# EAGLE board eagle (EAGLE 9.3.1)

Size 100 x 80 mm. Coordinates in mm from the lower left corner, seen from the top.
Outline: 0,0 100,0 100,80 0,80 0,0
Copper layers (1*16): Top 0.035mm / dielectric 1.5mm / Bottom 0.035mm
Design rules "default": minimum track width 6mil, minimum drill 0.35mm, track to track 6mil, track to pad 6mil, pad to pad 6mil, via to via 6mil, smd to smd 6mil, copper to edge 40mil, drill to drill 6mil, minimum pad ring 10mil, minimum via ring 8mil, stop-mask expansion 4mil, vias tented up to drill 0mil, thermal gap 10mil

## Footprints (pad centres in the part's own frame; a part is rotated, then mirrored left to right if it is on the bottom)
DIL16 = drill 0.813 long: 1 -8.89,-3.81; 2 -6.35,-3.81; 3 -3.81,-3.81; 4 -1.27,-3.81; 5 1.27,-3.81; 6 3.81,-3.81; 7 6.35,-3.81; 8 8.89,-3.81; 9 8.89,3.81; 10 6.35,3.81; 11 3.81,3.81; 12 1.27,3.81; 13 -1.27,3.81; 14 -3.81,3.81; 15 -6.35,3.81; 16 -8.89,3.81
DIL08 = drill 0.813 long: 1 -3.81,-3.81; 2 -1.27,-3.81; 3 1.27,-3.81; 4 3.81,-3.81; 5 3.81,3.81; 6 1.27,3.81; 7 -1.27,3.81; 8 -3.81,3.81
C025-050X050 = drill 0.813 octagon: 1 -1.27,0; 2 1.27,0
7SEG-13 = drill 0.813 long: 1 -5.08,-7.62; 2 -2.54,-7.62; 3 0,-7.62; 4 2.54,-7.62; 5 5.08,-7.62; 6 5.08,7.62; 7 2.54,7.62; 8 0,7.62; 9 -2.54,7.62; 10 -5.08,7.62
LED_LD260 = drill 0.813 octagon: A -1.27,0; K 1.27,0
1X03 = drill 1.016 long: 1 -2.54,0; 2 0,0; 3 2.54,0
F09V = drill 1.016 octagon: 1 5.486,1.422; 2 2.743,1.422; 3 0,1.422; 4 -2.743,1.422; 5 -5.486,1.422; 6 4.115,-1.422; 7 1.372,-1.422; 8 -1.372,-1.422; 9 -4.115,-1.422 | hole 3.302: -12.522,0; 12.522,0
TO18 = drill 0.813 octagon: 1 -1.27,-1.27; 2 1.27,-1.27; 3 1.27,1.27
0204/7 = drill 0.813 octagon: 1 -3.81,0; 2 3.81,0
B3F-10XX = drill 1.016 long: 1 -3.251,2.261; 2 3.251,2.261; 3 -3.251,-2.261; 4 3.251,-2.261
DIL40 = drill 0.813 long: 1 -24.13,-7.62; 2 -21.59,-7.62; 3 -19.05,-7.62; 4 -16.51,-7.62; 5 -13.97,-7.62; 6 -11.43,-7.62; 7 -8.89,-7.62; 8 -6.35,-7.62; 9 -3.81,-7.62; 10 -1.27,-7.62; 11 1.27,-7.62; 12 3.81,-7.62; 13 6.35,-7.62; 14 8.89,-7.62; 15 11.43,-7.62; 16 13.97,-7.62; 17 16.51,-7.62; 18 19.05,-7.62; 19 21.59,-7.62; 20 24.13,-7.62; 21 24.13,7.62; 22 21.59,7.62; 23 19.05,7.62; 24 16.51,7.62; 25 13.97,7.62; 26 11.43,7.62; 27 8.89,7.62; 28 6.35,7.62; 29 3.81,7.62; 30 1.27,7.62; 31 -1.27,7.62; 32 -3.81,7.62; 33 -6.35,7.62; 34 -8.89,7.62; 35 -11.43,7.62; 36 -13.97,7.62; 37 -16.51,7.62; 38 -19.05,7.62; 39 -21.59,7.62; 40 -24.13,7.62
QS = drill 0.61 long: 1 -2.54,0; 2 2.54,0

## Placement (x,y rotation side)
4511  [DIL16]  63.5,11.43 270 top
AMPLIOP  [DIL08]  40.64,59.69 0 top
C1  15pF  [C025-050X050]  31.75,72.39 0 top
C2  15pF  [C025-050X050]  15.24,33.02 0 top
C3  1uF  [C025-050X050]  77.47,43.18 0 top
C4  10uF  [C025-050X050]  58.42,58.42 180 top
C5  10uF  [C025-050X050]  64.77,55.88 180 top
C7  100u  [C025-050X050]  15.24,45.72 0 top
C61  10uF  [C025-050X050]  13.97,55.88 0 top
D1  [7SEG-13]  90.17,22.86 0 top
D2  [7SEG-13]  68.58,22.86 0 top
LED3  [LED_LD260]  3.81,16.51 0 top
LED4  [LED_LD260]  19.05,3.81 0 top
LM35  [1X03]  3.81,36.83 270 top
MAX232  [DIL16]  64.77,71.12 0 top
P1/COMPIM  [F09V]  91.44,52.07 90 top
Q2  2N2222  [TO18]  76.2,5.08 0 top
R1  10k  [0204/7]  8.89,77.47 180 top
R2  100  [0204/7]  10.16,2.54 0 top
R3  1k  [0204/7]  12.7,68.58 0 top
R4  280  [0204/7]  35.56,2.54 180 top
R5  280  [0204/7]  58.42,27.94 90 top
S1  [B3F-10XX]  41.91,74.93 0 top
T1  2N2222  [TO18]  86.36,5.08 0 top
U1  PIC16F877P  [DIL40]  31.75,13.97 0 top
X11  [QS]  33.02,39.37 0 top

## Library data of the parts
4511 AMPLIOP MAX232 = ic-package
C1-C5 C7 C61 R1-R5 = rcl
D1 D2 X11 = special
LED3 LED4 = eagle-ltspice; SPICEMODEL: NONE; SPICEPREFIX: D; SPICETYPE: diode
LM35 = pinhead
P1/COMPIM = con-subd; OC_FARNELL: unknown; OC_NEWARK: unknown
Q2 T1 = transistor
S1 = switch-omron; MPN: B3F-1000; OC_FARNELL: 176432; OC_NEWARK: 36M3542
U1 = microchip; MF: MICROCHIP; MPN: PIC16F877-04/P; OC_FARNELL: 9761349; OC_NEWARK: 61K3463

## Nets
COMPIM: 4511.12 D1.6 D2.6
GND: 4511.5 AMPLIOP.4 C1.1 C2.1 C3.1 C61.2 LED3.K LED4.K LM35.3 Q2.1 R2.1 S1.3 S1.4 T1.1 U1.12 U1.31
N$2: C2.2 U1.14 X11.1
N$5: MAX232.14 P1/COMPIM.2
N$6: LED3.A R5.2
N$8: C1.2 U1.13 X11.2
N$9: 4511.1 U1.20
N$10: LED4.A R4.2
N$11: MAX232.13 P1/COMPIM.3
N$12: C61.1 MAX232.6
N$13: R4.1 U1.15
N$14: R5.1 U1.16
N$15: C7.1 MAX232.2
N$18: C4.1 MAX232.3
N$21: C4.2 MAX232.1
N$22: C5.2 MAX232.4
N$24: C5.1 MAX232.5
N$25: C3.2 R1.1 S1.1 S1.2 U1.1
N$26: 4511.7 U1.19
N$27: D1.3 D1.8 T1.3
N$28: 4511.2 U1.21
N$29: 4511.6 U1.22
N$30: AMPLIOP.3 LM35.2
N$31: MAX232.12 U1.25
N$32: MAX232.11 U1.26
N$33: T1.2 U1.8
N$34: AMPLIOP.2 R2.2 R3.1
N$35: AMPLIOP.6 R3.2 U1.2
N$36: 4511.13 D1.7 D2.7
N$37: 4511.10 D1.2 D2.2
N$38: 4511.11 D1.4 D2.4
N$39: 4511.9 D1.1 D2.1
N$44: 4511.14 D1.10 D2.10
N$47: D2.3 D2.8 Q2.3
N$48: Q2.2 U1.9
N$53: 4511.15 D1.9 D2.9
VCC: 4511.3 4511.4 AMPLIOP.7 C7.2 LM35.1 R1.2 U1.11 U1.32

## Tracks (layer width: path | path; a pad name or v marks a point on that pad's centre or on a via)
COMPIM  (2 unrouted)
GND  (15 unrouted)
N$2  (2 unrouted)
N$5  (1 unrouted)
N$6  (1 unrouted)
N$8  (2 unrouted)
N$9  (1 unrouted)
N$10  (1 unrouted)
N$11  (1 unrouted)
N$12  (1 unrouted)
N$13  (1 unrouted)
N$14  (1 unrouted)
N$15  (1 unrouted)
N$18  (1 unrouted)
N$21  (1 unrouted)
N$22  (1 unrouted)
N$24  (1 unrouted)
N$25  (4 unrouted)
N$26  (1 unrouted)
N$27  (2 unrouted)
N$28  (1 unrouted)
N$29  (1 unrouted)
N$30  (1 unrouted)
N$31  (1 unrouted)
N$32  (1 unrouted)
N$33  (1 unrouted)
N$34  (2 unrouted)
N$35  (2 unrouted)
N$36  (2 unrouted)
N$37  (2 unrouted)
N$38  (2 unrouted)
N$39  (2 unrouted)
N$44  (2 unrouted)
N$47  (2 unrouted)
N$48  (1 unrouted)
N$53  (2 unrouted)
VCC  (7 unrouted)